# Altium PCB SoldeerboutPCB1.PcbDoc
Units mil, origin at the board's own origin, x right, y up, seen from the top; angles counter-clockwise.
Board outline 6000 x 4000 mil, 2 copper layers (Top Layer, Bottom Layer); 76 components, 74 nets, 283 pads, 2 vias.
Unrouted connection lines stored in the file: 156.
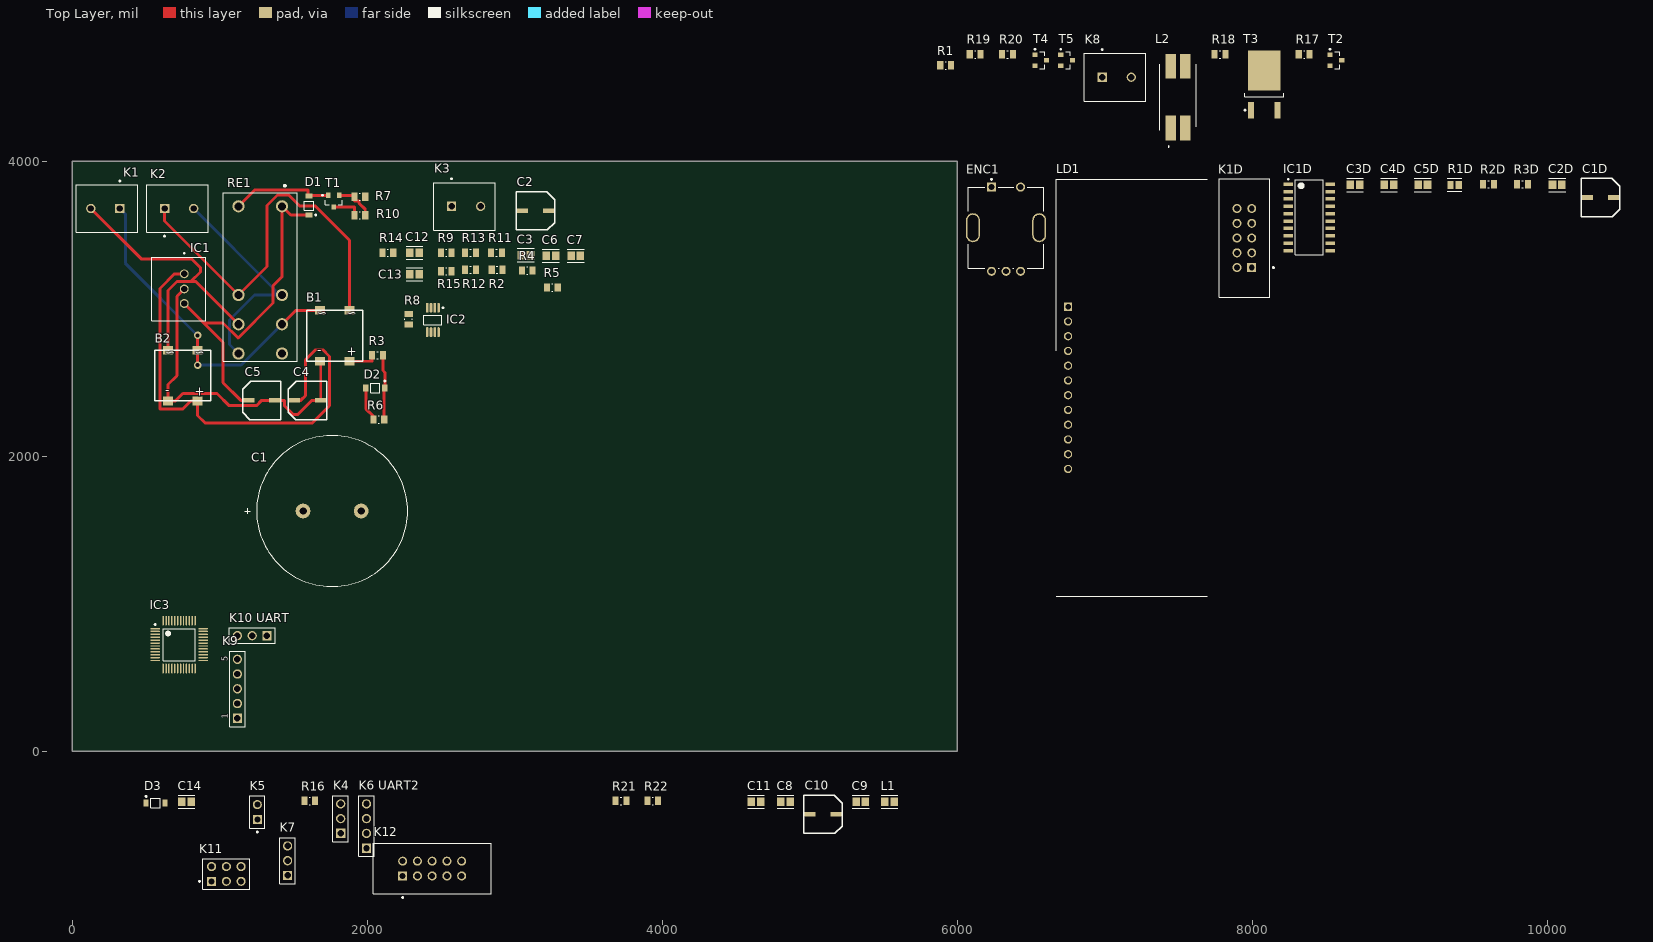
[diagram p0: Top Layer view]
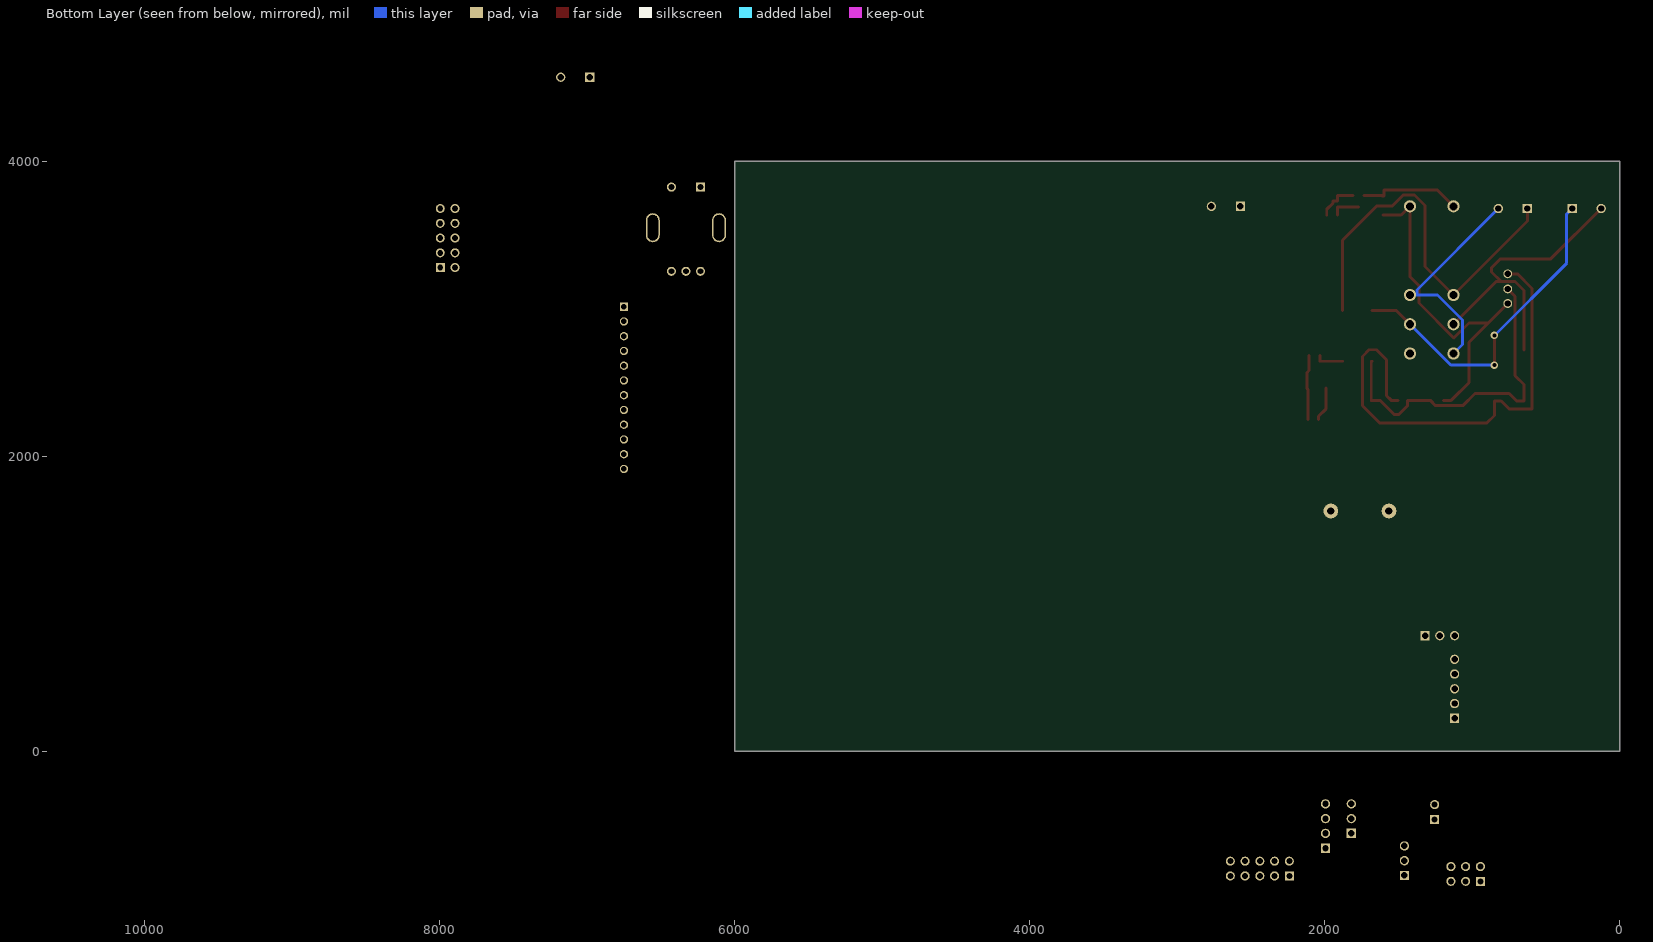
[diagram p1: Bottom Layer view, seen from below]

## Layer stack, top to bottom
Top Solder: solder mask 0.4, Solder Resist, Dk 3.5
Top Layer: signal copper 1.4
Dielectric 1: dielectric 12.6, FR-4, Dk 4.8
Bottom Layer: signal copper 1.4
Bottom Solder: solder mask 0.4, Solder Resist, Dk 3.5

## Board outline
0,0 6000,0 6000,4000 0,4000

## Design rules (kind name [scope] priority, off if disabled: settings)
Clearance [All] p1: gap=10 ignorepadtopadclearanceinfootprint=FALSE except(0: Arc-Hole Track-Hole SMDPad-Hole THPad-Hole Via-Hole Fill-Hole Poly-Hole Region-Hole Text-Hole; 5: SMDPad-SMDPad)
PolygonConnect [All] p1: connectstyle=Relief reliefconductorwidth=10 reliefentries=4 polygonreliefangle="90 Angle" airgapwidth=10
RoomDefinition thermokoppel [InComponentClass('thermokoppel')] p1: confinementstyle=ConfineIn formatcopy=TRUE lockcomponents=FALSE outline 1800,4320 5995,4320 5995,4800 1800,4800
RoomDefinition PWM_Soldeerbout [InComponentClass('PWM_Soldeerbout')] p2: confinementstyle=ConfineIn formatcopy=TRUE lockcomponents=FALSE outline 6045,4050 8635,4050 8635,4875 6045,4875
RoomDefinition Display [InComponentClass('Display')] p3: confinementstyle=ConfineIn formatcopy=TRUE lockcomponents=FALSE outline 6045,1035 10500,1035 10500,3995 6045,3995
RoomDefinition CPU [InComponentClass('CPU')] p4: confinementstyle=ConfineIn formatcopy=TRUE lockcomponents=FALSE outline 470,-1115 5620,-1115 5620,-185 470,-185
RoutingVias [All] p1: holewidth=28 width=50 viastyle="Through Hole" minholewidth=28 minwidth=50 maxholewidth=28 maxwidth=50
SolderMaskExpansion [All] p1: expansion=4 istentingtop=FALSE
Width [All] p1: maxlimit=20 minlimit=20 preferedwidth=20 minimp=50.000000 maximp=50.000000 favimp=50.000000
30 further rules are at their usual default settings.

## Classes and differential pairs
component class voeding: B1 B2 C1 C4 C5 D1 D2 IC1 K1 K2 R3 R6 R7 R10 RE1 T1
component class thermokoppel: C2 C3 C6 C7 C12 C13 IC2 K3 R1 R2 R4 R5 R8 R9 R11 R12 R13 R14 R15
component class PWM_Soldeerbout: K8 L2 R17 R18 R19 R20 T2 T3 T4 T5
component class Display: C1D C2D C3D C4D C5D ENC1 IC1D K1D LD1 R1D R2D R3D
component class CPU: C8 C9 C10 C11 C14 D3 IC3 K4 K5 "K6 UART2" K7 K9 "K10 UART" K11 K12 L1 R16 R21 R22

## Components (designator, comment, footprint, x,y, rotation, side; value= is the part's Value field where it differs from the comment)
B1 "Bridge_Rectifier" ttf 1780,2820 r0 top
B2 "Bridge_Rectifier" ttf 750,2550 r0 top
C1 "4700µf" CE_D25_L25_plugin 1958.7,1630 r180 top
C1D "100µf" CE_D6,3_L4,5 10360,3755 r0 top
C2 "10µf" CE_D6,3_L4,5 3140,3665 r0 top
C2D "100nf" CC_0805_L 10065,3840 r0 top value="0.22 μF"
C3 "100nF" CC_0805_L 3075,3365 r0 top value="0.22 μF"
C3D "10nf" CC_0805_L 8695,3840 r0 top value="0.22 μF"
C4 "100µf" CE_D6,3_L4,5 1595,2380 r180 top
C4D "10nf" CC_0805_L 8925,3840 r0 top value="0.22 μF"
C5 "10µf" CE_D6,3_L4,5 1285,2380 r180 top
C5D "10nf" CC_0805_L 9155,3840 r0 top value="0.22 μF"
C6 "10nF" CC_0805_L 3245,3360 r0 top value="0.22 μF"
C7 "10nF" CC_0805_L 3413.47,3360 r0 top value="0.22 μF"
C8 "100nf" CC_0805_L 4835,-340 r0 top value="0.22 μF"
C9 "100nf" CC_0805_L 5345,-340 r0 top value="0.22 μF"
C10 "10µf" CE_D6,3_L4,5 5090,-425 r0 top
C11 "100nf" CC_0805_L 4635,-340 r0 top value="0.22 μF"
C12 "10nF" CC_0805_L 2320,3380 r0 top value="0.22 μF"
C13 "10nF" CC_0805_L 2320,3235 r0 top value="0.22 μF"
C14 "100nf" CC_0805_L 775,-340 r0 top value="0.22 μF"
D1 "Diode" SOD-123FL 1605,3700 r90 top value=15pF
D2 "Zener_Diode" SOD-123FL 2055,2465 r180 top
D3 "Diode" SOD-123FL 565,-350 r0 top value=15pF
ENC1 "ROTARY_ENCODER_1" PEC11R_4220F_S0012 6330,3550 r0 top
IC1 "OKI-78SR-5/1.5-W36-C" OKI78SR515W36C 760,3237.36 r270 top
IC1D "TM1637" SOP_20_M 8385,3620 r0 top
IC2 "Dual_Opamp" MSOP_8_M 2445,2925 r270 top
IC3 "ATMEGA4809" TQFP_48_M 725,725 r0 top
K1 "282836-2" "2x1 Schroef pin TECO-282836-2_V" 225,3680 r180 top
K1D "1-1634688-0" "5x2 pin - TECO-1-1634688-0-10_V" 7945,3480 r90 top
K2 "282836-2" "2x1 Schroef pin TECO-282836-2_V" 725,3680 r0 top
K3 "282836-2" "2x1 Schroef pin TECO-282836-2_V" 2670,3695 r0 top
K4 "61300311121" "3x1 pin" 1820,-455 r90 top
K5 "M20-9990246" "2x1 pin" 1255,-410 r90 top
"K6 UART2" "61300411121" "4x1 pin" 1995,-505 r90 top
K7 "61300311121" "3x1 pin" 1460,-740 r90 top
K8 "282836-2" "2x1 Schroef pin TECO-282836-2_V" 7080,4570 r0 top
K9 "61300511121" "5x1 pin" 1120,425 r90 top
"K10 UART" "61300311121" "3x1 pin" 1220,785 r180 top
K11 "3x2 Pin_1" "3x2 pin FP-M20-9980346-MFG" 1045,-830 r0 top
K12 "1-1634688-0" "5x2 pin - TECO-1-1634688-0-10_V" 2440,-793.31 r0 top
L1 "Choke" CC_0805_L 5540,-340 r0 top
L2 "Common_Mode_Choke" 2545 7495,4435 r0 top
LD1 "7SEG - KW4-801AVB" kw4 6750,2715 r0 top
R1 "18Kohm" R_0805_M 5920,4650 r0 top
R1D "10K" CC_0805_m 9370,3840 r0 top
R2 "1Mohm" R_0805_M 2880,3265 r0 top
R2D "10K" R_0805_M 9600,3845 r0 top
R3 "68Kohm" R_0805_M 2070,2685 r180 top
R3D "10K" R_0805_M 9830,3845 r0 top
R4 "5.6Kohm" R_0805_M 3085,3260 r0 top
R5 "5.6Kohm" R_0805_M 3255,3145 r0 top
R6 "10Kohm" R_0805_M 2078.58,2250 r0 top
R7 "10Kohm" R_0805_M 1950,3760 r180 top
R8 "100ohm" R_0805_M 2280,2930 r270 top
R9 "10Mohm" R_0805_M 2535,3380 r0 top
R10 "47Kohm" R_0805_M 1950,3635 r0 top
R11 "18Kohm" R_0805_M 2876.42,3380 r0 top
R12 "18Kohm" R_0805_M 2700,3265 r0 top
R13 "5.6Kohm" R_0805_M 2700,3380 r180 top
R14 "5.6Kohm" R_0805_M 2140,3380 r180 top
R15 "100ohm" R_0805_M 2535,3255 r180 top
R16 "47Kohm" R_0805_M 1610,-335 r0 top
R17 "47Kohm" R_0805_M 8350,4725 r0 top
R18 "100ohm" R_0805_M 7780,4725 r0 top
R19 "10Kohm" R_0805_M 6120,4725 r0 top
R20 "47Kohm" R_0805_M 6340,4725 r0 top
R21 "47Kohm" R_0805_M 3720,-335 r0 top
R22 "47Kohm" R_0805_M 3935,-335 r0 top
RE1 "RELAY_GENERAL_PURPOSE" RT42 1275,3695 r270 top
T1 "Transistor_NPN" SOT_23#1 1772.4,3730.63 r270 top
T2 "Transistor_NPN" SOT_23#2 8565,4685 r0 top
T3 "MOSFET_P (IRF9Z34NPBF)" TO_252 8080,4520 r90 top
T4 "Transistor_NPN" SOT_23#2 6565,4685 r0 top
T5 "Transistor_PNP" SOT_23#2 6740,4685 r0 top

## Footprints (in the part's own frame and the unit in brackets; to place one, negate y for a bottom-side part, rotate by r counter-clockwise, add the part's x,y. Pads: shape width x height; smd on the part's side, far side on the other; paste and mask are expansions set on the pad)
"2x1 pin" [mm]
  rect 1.57x1.57 hole 1.02 paste-1000 mask+0: 1(-1.27,0)
  round 1.57 hole 1.02 paste-1000 mask+0: 2(1.27,0)
  silkscreen extent -3.55,-1.32 2.79,1.32, body extent -2.89,-1.42 2.89,1.42, height 0.25
"2x1 Schroef pin TECO-282836-2_V" [mm] "Female Header, Pitch 5mm, 1 x 2 Position, Height 10mm"
  rect 1.6x1.6 hole 1.1: 1(-2.5,0)
  round 1.6 hole 1.1: 2(2.5,0)
  silkscreen extent -5.6,-4.87 5,4.1, body extent -5.6,-4.1 5,4.1, height 13.5
"3x1 pin" [mm] "Pin Header, pitch 2.54 mm, THT, Vertical, single row, 3p"
  rect 1.6x1.6 hole 1.1: 1(-2.54,0)
  round 1.6 hole 1.1: 2(0,0) 3(2.54,0)
  silkscreen extent -3.96,-1.34 3.96,1.34, body extent -3.81,-1.27 3.81,1.27, height 8.57
"3x2 pin FP-M20-9980346-MFG" [mm]
  rect 1.57x1.57 hole 1.02 paste-1000 mask+0: 1(-2.54,-1.27)
  round 1.57 hole 1.02 paste-1000 mask+0: 2(-2.54,1.27) 3(0,-1.27) 4(0,1.27) 5(2.54,-1.27) 6(2.54,1.27)
  silkscreen extent -4.76,-2.64 4.06,2.64, body extent -4.16,-2.74 4.16,2.74, height 0.25
"4x1 pin" [mm] "Pin Header, pitch 2.54 mm, THT, Vertical, single row, 4p"
  rect 1.6x1.6 hole 1.1: 1(-3.81,0)
  round 1.6 hole 1.1: 2(-1.27,0) 3(1.27,0) 4(3.81,0)
  silkscreen extent -5.23,-1.34 5.23,1.34, body extent -5.08,-1.27 5.08,1.27, height 8.57
"5x1 pin" [mm] "Pin Header, pitch 2.54 mm, THT, Vertical, single row, 5p"
  rect 1.6x1.6 hole 1.1: 1(-5.08,0)
  round 1.6 hole 1.1: 2(-2.54,0) 3(0,0) 4(2.54,0) 5(5.08,0)
  silkscreen extent -6.5,-1.34 6.5,1.34, body extent -6.35,-1.27 6.35,1.27, height 8.57
"5x2 pin - TECO-1-1634688-0-10_V" [mm] "10-Pin Connector, Body 20.35x8.7mm, Pitch 2.54mm"
  rect 1.55x1.55 hole 1.02: 1(-5.08,-1.27)
  round 1.55 hole 1.02: 2(-5.08,1.27) 3(-2.54,-1.27) 4(-2.54,1.27) 5(0,-1.27) 6(0,1.27) 7(2.54,-1.27) 8(2.54,1.27) 9(5.08,-1.27) 10(5.08,1.27)
  silkscreen extent -10.18,-5.13 10.18,4.35, body extent -10.17,-4.35 10.18,4.65, height 9
2545 [mm]
  rect 1.78x4.27 smd: 1(-1.27,-5.305) 2(1.27,-5.305) 3(1.27,5.305) 4(-1.27,5.305)
  silkscreen extent -3.15,-8.6 3.15,5.69, body extent -3.15,-7.26 3.15,7.26, height 9.6
CC_0805_L [mil]
  rect 51.36x57.33 smd paste+0 mask+0: 1(-31.53,0) 2(31.53,0)
  silkscreen extent -57,-44 57,44, body extent -67,-39 67,39, height 10
CC_0805_m [mil]
  rect 43.49x53.39 smd paste+0 mask+0: 1(-27.59,0) 2(27.59,0)
  silkscreen extent -49,-44 49,44, body extent -53,-32 53,32, height 10
CE_D6,3_L4,5 [mm]
  rect 2x0.8 smd: 1(-2.286,0) 2(2.286,0)
  silkscreen extent -3.3,-3.3 3.3,3.3
CE_D25_L25_plugin [mm]
  round 2.54 hole 1.27: 1(0,0) 2(10,0)
  silkscreen extent -8,-13 20.07,13
kw4 [mm]
  rect 1.425x1.425 hole 0.95: 1(0,7.62)
  round 1.425 hole 0.95: 2(0,5.08) 3(0,2.54) 4(0,0) 5(0,-2.54) 6(0,-5.08) 7(0,-7.62) 8(0,-10.16) 9(0,-12.7) 10(0,-15.24) 11(0,-17.78) 12(0,-20.32)
  silkscreen extent -2.02,-42.23 23.93,29.53
MSOP_8_M [mm] "TSOP, 8-Leads, Body 3x3mm, Pitch 0.65mm, IPC Medium Density"
  oval 1.7x0.45 smd: 1(-2.1,0.975) 2(-2.1,0.325) 3(-2.1,-0.325) 4(-2.1,-0.975) 5(2.1,-0.975) 6(2.1,-0.325) 7(2.1,0.325) 8(2.1,0.975)
  silkscreen extent -2.22,-1.55 0.85,1.88, body extent -1.55,-1.55 1.55,1.55, height 1.1
OKI78SR515W36C [mm]
  round 1.519 hole 1.08: 1(0,0) 2(2.6,0) 3(5.1,0)
  silkscreen extent -3.6,-5.6 8.05,3.7, body extent -2.85,-3.7 8.05,5.6, height 16.6
PEC11R_4220F_S0012 [mm]
  rect 1.55x1.55 hole 1 paste-1000 mask+0: 1(-2.5,7)
  round 1.55 hole 1 paste-1000 mask+0: 2(2.5,7) A(-2.5,-7.5) B(2.5,-7.5) C(0,-7.5)
  rrect100% 2.4x5 hole 4.4 slot 1.8 at 0 deg paste-1000 mask+0: 3(-5.7,0) 4(5.7,0)
  silkscreen extent -6.5,-6.95 6.5,8.45, body extent -7,-8.37 7,7.88, height 0.25
R_0805_M [mm] "Chip Resistor, 2-Leads, Body 2.00x1.25mm, IPC Medium Density"
  rect 1.05x1.45 smd: 1(-0.925,0) 2(0.925,0)
  silkscreen extent -0.1,-0.62 0.1,0.62, body extent -1.1,-0.72 1.1,0.72, height 0.5
RT42 [mm]
  round 2.1 hole 1.4: 11(20.3,3.75) 12(15.26,3.75) 14(25.34,3.75) 21(20.3,-3.75) 22(15.26,-3.75) 24(25.34,-3.75) A1(0,3.75) A2(0,-3.75)
  silkscreen extent -3.67,-6.35 26.65,6.35, body extent -2.21,-6.35 26.79,6.35, height 3.26
SOD-123FL [mm] "SOD, 2-Leads, Body 2.7x1.65mm"
  rect 0.91x1.22 smd: 1(-1.635,0) 2(1.635,0)
  silkscreen extent -1.76,-1.29 0.78,0.82, body extent -1.35,-0.82 1.35,0.82, height 1
SOP_20_M [mm] "SOIC,20-Leads,Body 12.9x5.6mm,Pitch 1.27mm,IPC Medium Density"
  rrect17% 1.65x0.6 smd: 1(-3.625,5.715) 2(-3.625,4.445) 3(-3.625,3.175) 4(-3.625,1.905) 5(-3.625,0.635) 6(-3.625,-0.635) 7(-3.625,-1.905) 8(-3.625,-3.175) 9(-3.625,-4.445) 10(-3.625,-5.715) 11(3.625,-5.715) 12(3.625,-4.445) 13(3.625,-3.175) 14(3.625,-1.905) 15(3.625,-0.635) 16(3.625,0.635) 17(3.625,1.905) 18(3.625,3.175) 19(3.625,4.445) 20(3.625,5.715)
  silkscreen extent -3.75,-6.45 2.4,6.69, body extent -2.8,-6.45 2.8,6.45, height 2
SOT_23#1 [mm] "SOT23, 3-Leads, Body 2.92x1.3mm, Pitch 0.95mm"
  rect 0.9x0.8 smd: 1(-1,-0.95) 2(-1,0.95) 3(1,0)
  silkscreen extent -1.12,-2.02 0.65,1.46, body extent -0.65,-1.46 0.65,1.46, height 1.11
SOT_23#2 [mm] "SOT23, 3-Leads, Body 2.92x1.3mm, Pitch 0.95mm"
  rect 0.9x0.8 smd: 1(-1,0.95) 2(-1,-0.95) 3(1,0)
  silkscreen extent -1.12,-1.46 0.65,2.02, body extent -0.65,-1.46 0.65,1.46, height 1.11
TO_252 [mm] "DPAK, 3-Leads, Body 6.5x6.12mm, Pitch 2.28mm, IPC Low Density"
  rect 2.85x1 smd: 1(-4.4,2.28) 3(-4.4,-2.28)
  rect 6.9x5.65 smd: 2(2.4,0)
  silkscreen extent -4.52,-3.35 -1.45,3.45, body extent -2.05,-3.32 4.17,3.32, height 2.35
TQFP_48_M [mm]
  rect 1.655x0.252 smd paste+0 mask+0: 1(-4.125,2.75)
  rrect100% 1.655x0.252 smd paste+0 mask+0: 2(-4.125,2.25) 3(-4.125,1.75) 4(-4.125,1.25) 5(-4.125,0.75) 6(-4.125,0.25) 7(-4.125,-0.25) 8(-4.125,-0.75) 9(-4.125,-1.25) 10(-4.125,-1.75) 11(-4.125,-2.25) 12(-4.125,-2.75) 25(4.125,-2.75) 26(4.125,-2.25) 27(4.125,-1.75) 28(4.125,-1.25) 29(4.125,-0.75) 30(4.125,-0.25) 31(4.125,0.25) 32(4.125,0.75) 33(4.125,1.25) 34(4.125,1.75) 35(4.125,2.25) 36(4.125,2.75)
  rrect100% 0.252x1.655 smd paste+0 mask+0: 13(-2.75,-4.125) 14(-2.25,-4.125) 15(-1.75,-4.125) 16(-1.25,-4.125) 17(-0.75,-4.125) 18(-0.25,-4.125) 19(0.25,-4.125) 20(0.75,-4.125) 21(1.25,-4.125) 22(1.75,-4.125) 23(2.25,-4.125) 24(2.75,-4.125) 37(2.75,4.125) 38(2.25,4.125) 39(1.75,4.125) 40(1.25,4.125) 41(0.75,4.125) 42(0.25,4.125) 43(-0.25,4.125) 44(-0.75,4.125) 45(-1.25,4.125) 46(-1.75,4.125) 47(-2.25,4.125) 48(-2.75,4.125)
  silkscreen extent -4.25,-2.75 2.75,3.58, body extent -5.2,-5.2 5.2,5.2, height 0.25
ttf [mm]
  rect 1.7x1.5 smd: 1(2.54,-4.445) 2(-2.54,-4.445) 3(-2.54,4.318) 4(2.54,4.318)
  silkscreen extent -4.83,-4.4 4.83,4.3

## Part data
B1 B2: Average Rectified Current-Max=0.8A, Forward Voltage=1V, Manufacturer="Diodes Inc", Package Description="4-Pin Small Outline Integrated Circuit, Body 4.7 x 3.8 mm, Pitch 2.5 mm", Package Reference=MiniDIP-4, Package Version=05/2016, Peak Current-Max=30A, Reverse Current-Max=5µA, Reverse Voltage-Max [Vrrm]=600V, Datasheet URL=http://www.diodes.com/_files/datasheets/ds17003.pdf, Datasheet Version="Rev. 13-2, 12/2010", Manufacturer URL=http://www.diodes.com/, Mounting Technology=SurfaceMount, Package URL=http://www.diodes.com/_files/packages/MiniDIP.pdf
C1 C1D C2 C4 C5 C10: library part Capacitor_Electrolytic, Manufacturer=Panasonic, Max Operating Temperature="105 degC", Min Operating Temperature="-55 degC", Package Quantity=500, Voltage Rating="25 V", ComponentLink1Description="Manufacturer URL", ComponentLink1URL=http://www.panasonic.com/, ComponentLink2Description=Datasheet, ComponentLink2URL=http://industrial.panasonic.com/cdbs/www-data/pdf/RDE0000/ABA0000C1181.pdf, DatasheetVersion=03/2016, Height="10.2 mm", Lead Pitch="3.1 mm", Length="10.2 mm", Mount="Surface Mount", Mounting Technology="Surface Mount", PackageDescription="2-Pin Electrolytic Aluminum Capacitor, Body 8.3 x 8.3 mm", PackageReference=EEE-FK1E221P, Packaging="Tape and Reel", Pins=2, REACH SVHC="No SVHC", RoHSCompliant=true
C2D C3 C3D C4D C5D C6 C7 C8 C9 C11 C12 C13 C14: library part Capacitor_Ceramic, Capacitance="0.22 μF", Manufacturer=KEMET, Manufacturer Part Number=C0805C224K5RACTU, Package=C0805C-DN, Temperature="-55°C to +125°C", Temperature Characteristic=X7R, Temperature Coefficient=30ppm/°C, Temperature Range High=+125°C, Temperature Range Low=-55°C, Tolerance=0.1, Voltage Rating="50 V", Automotive=No, Category=Cap, ComponentLink2Description=Datasheet, ComponentLink2URL=https://content.kemet.com/datasheets/KEM_C1003_C0G_SMD.pdf, Device Class L1="Passive Components", Device Class L2=Capacitors, Device Class L3="Ceramic Capacitors", Digikey Description="CAP CER 0.22UF 50V X7R 0805", Height=0.88mm, Ipc Land Pattern Name=CAPC200125X78, Lead Free=Yes, Material=Ceramic, Mouser Description="CAP CER 0.22UF 50V X7R 0805", Octopart=https://octopart.com/c0805c224k5ractu-kemet-144670, RoHS=TRUE
D1 D3: Capacitance=15pF, Forward Current=1A, Manufacturer=Diotec, Manufacturer Part Number=1N4007, Max Junction Temp=+175°C, Max Repetitive Reverse Voltage=1000V, Max Surge Forward Current=27A, Peak Reverse Current=5uA, Temperature="-50°C to +175°C", Temperature Range Low=-50°C, Automotive=No, Category=Diode, ComponentLink2Description=Datasheet, ComponentLink2URL=https://datasheet.octopart.com/1N4007-Diotec-datasheet-62346875.pdf, Device Class L1="Discrete Semiconductors", Device Class L2=Diodes, Device Class L3="Rectifier Diodes", Height=2.8mm, Ipc Land Pattern Name=DIOAD888W100L520D280, Lead Free=Yes, Octopart=https://octopart.com/1n4007-diotec-4040411, Package=1N4007, Reverse Voltage=1000V, RoHS=TRUE, Temperature Range High=+175°C
D2: Manufacturer="On Semiconductor", PartNumber=1SMB5920BT3G, ComponentLink1Description="Manufacturer URL", ComponentLink1URL=http://www.onsemi.com/, ComponentLink2Description=Datasheet, ComponentLink2URL=http://www.onsemi.com/pub_link/Collateral/1SMB5913BT3-D.PDF, ComponentLink3Description="Package Specification", ComponentLink3URL=http://www.onsemi.com/pub_link/Collateral/1SMB5913BT3-D.PDF, DatasheetVersion="Rev. 8", Mounting Technology="Surface Mount", PackageDescription="2-Pin Small Molded Package, J-Bend Lead, Body 4.33 x 3.625 mm", PackageReference=SMB-2-403A-03_H, PackageVersion="Rev. H, 05/2011", Packing="Tape and Reel", RoHS=Pb-Free, VZ Typ (V)=6.2
ENC1: Current Rating=10mA, Manufacturer=Bourns, Manufacturer Part Number=PEC11R-4015F-N0024, Package=0, Temperature="-30°C to +70°C", Temperature Range High=+70°C, Temperature Range Low=-30°C, Voltage Rating Dc=5V, Automotive=No, Category=Enc, ComponentLink2Description=Datasheet, ComponentLink2URL=https://www.bourns.com/docs/product-datasheets/pec11r.pdf?sfvrsn=bb617cbf_7, Conn Orientation=Vertical, Detent=No, Device Class L1=Electromechanical, Device Class L2=Switches, Device Class L3=Encoders, Digikey Description="ROTARY ENCODER MECHANICAL 24PPR", Encoder Type=Incremental, Height=22.3mm, Lead Free=Yes, Mouser Description="Encoders 15mm SHAFT NO SWITCH", Number Of Circuits=1, Octopart=https://octopart.com/pec11r-4015f-n0024-bourns-26648251, Pulses Per Rev=24, RoHS=TRUE
IC1: "Non-Isolated DC/DC Converter, 7.5 W, 7 to 36 V, 1.5 A, -40 to 85 degC, 3-Pin THD, RoHS", Current - Output (Max)=1.5A, Manufacturer=Murata, Operating Temperature=-40degC~85degC, Package / Case=3-SIPModule, Power (Watts) - Manufacture Series=8W, Voltage - Input (Max)=36V, Voltage - Input (Min)=7V, Voltage - Isolation=-, Voltage - Output 1=5V, Applications=ITE(Commercial), Category=PowerSupplies-BoardMount, Datasheet URL=https://datasheet.ciiva.com/8006/1790439-8006672.pdf, Datasheet Version=Oct-13, Efficiency=90.5%, Family=DCDCConverters, Features=SCP, Manufacturer URL=http://www.murata.com/, Mounting Type=ThroughHole, Number of Outputs=1, Packaging=Tube, Power (Watts) - Max=8W, Series=Okami™OKI-78SR, Size / Dimension="0.41\"Lx0.30\"Wx0.65\"H(10.4mmx7.6mmx16.5mm)", Type=LinearRegulatorReplacement, Voltage - Output 2=-, Voltage - Output 3=-
IC1D: "LED Drive Control Special Circuit", Package=Package, Availability="Not in stock", Check_prices=https://www.snapeda.com/parts/TM1637/Titan+Micro+Electronics/view-part/?ref=eda, MF="Titan Micro Electronics", MP=TM1637, Price=None, SnapEDA_Link=https://www.snapeda.com/parts/TM1637/Titan+Micro+Electronics/view-part/?ref=snap
IC2: Case/Package=PDIP, Input Bias Current=1pA, Input Offset Voltage (Vos)=4.5mV, Max Operating Temperature=125°C, Max Supply Voltage=6V, Min Operating Temperature=-40°C, Min Supply Voltage=1.8V, Nominal Supply Current=100uA, Operating Supply Voltage=5.5V, Output Current=23mA, Package Quantity=60, Power Supply Rejection Ratio (PSRR)=86dB, Voltage Gain=112dB, Amplifier Type="GENERAL PURPOSE", Bandwidth=1MHz, Common Mode Rejection Ratio=60dB, Gain Bandwidth Product=1MHz, Height=3.3mm, Input Offset Voltage-Max=4.5mV, Lead Free="Lead Free", Length=9.27mm, Mount="Through Hole", Number of Amplifiers=2, Number of Channels=2, Number Of Circuits=2, Number of Elements=2, Number of Pins=8, Operating Supply Current=100uA, Output Current per Channel=23mA, Packaging=Rail/Tube, Radiation Hardening=No, REACH SVHC="No SVHC", RoHS Compliant=Yes, Slew Rate=0.6V/µs, Slew Rate-Nom=0.6V/µs, Supply Current=100uA, Technology=CMOS, Unity Gain Bandwidth Product=1MHz, Width=6.35mm
IC3: Case/Package=TQFP, Max Operating Temperature=85°C, Min Operating Temperature=-40°C, Core Architecture=AVR, Interface=I2C, Memory Size=48KB, Memory Type=FLASH, Mount="Surface Mount", Number of I/Os=41, Oscillator Type=Internal, Peripherals="Brown-out Detect/Reset", RoHS Compliant=Yes, Series="megaAVR® 0, Functional Safety (FuSa)"
K1 K2 K3 K8: library part "2x1 schroef pin", "Female Header, Pitch 5 mm, 1 x 2 Position, Height 10 mm, Tail Length 3.5 mm, Rohs, Bulk", Color=Green, Current=13.5A, Manufacturer="TE Connectivity", Package Description="Female Header, Pitch 5 mm, 1 x 2 Position, Height 10 mm, Tail Length 3.5 mm", Package Reference=THD, Standard Package=300, Voltage=300V, 3D Model=282836-2.pdf, Category=Connectors,Interconnects, Clamp Material - Plating=Brass-NickelPlated, Contact Material - Plating=Brass-TinPlated, Datasheet URL=http://www.te.com.cn/commerce/DocumentDelivery/DDEController?Action=showdoc&DocId=Catalog+Section%7F1308389_EUROSTYLE_TERMINAL_BLOCKS%7F0607%7Fpdf%7FEnglish%7FENG_CS_1308389_EUROSTYLE_TERMINAL_BLOCKS_0607.pdf%7F282836-2, Dynamic Catalog=BuchananSeries, Family=TerminalBlocks-WiretoBoard, Featured Product=EurostyleTerminalBlockConnectors, Features=Interlocking(Side), Housing Material=Polyamide(PA66),Nylon6/6, Manufacturer URL=http://www.te.com, Mating Orientation=HorizontalwithBoard, Mounting Type=ThroughHole, Number of Levels=1, Other Names="5ULV-02B / A98076", Packaging=Bulk, Pitch="0.197\"(5.00mm)", Positions Per Level=2, Product Training Modules=Wire-to-BoardEurostyleTerminalBlocks, RoHS Information=282836-2StatementofCompliance, Screw Material - Plating=Brass-NickelPlated, Screw Thread=M3, Series=Buchanan, Torque - Screw=0.68Nm(6Lb-In), Wire Gauge=16-30AWG, Wire Termination=Screw-RisingCageClamp
K1D K12: library part "5x2 Pin", "Male Header, Pitch 2.54 mm, 2 x 5 Postion, Height 9.15 mm, Tail Length 3.2 mm, -40 to 105 degC, RoHS, Bulk", Manufacturer="TE Connectivity", Package Description="10-Pin Connector, Body 20.35 x 8.7 mm, Pitch 2.54 mm", Package Version="Rev. C2, 02/2011", Contact Material=Brass, Contact Plating=GoldPlatedContacts, Contact Termination Type=ThroughHole, Datasheet URL=https://datasheet.ciiva.com/6831/eng-cd-1634688-c2-6831201.pdf, Datasheet Version="Rev. C2, 02/2011", Gender=Header, Manufacturer URL=http://www.te.com/, Mounting Technology=ThroughHole, No. of Contacts=10Contacts, No. of Positions=10, No. of Rows=2, Orientation=Straight, Package Reference=1-1634688-0, Package URL=https://datasheet.ciiva.com/6831/eng-cd-1634688-c2-6831201.pdf, PartNumber=1-1634688-0, Pitch=2.54mm, Pitch Spacing=2.54mm, Product Range=-, SVHC=ToBeAdvised
K4 K7 "K10 UART": library part "3x1 pin", "THT Vertical Pin Header WR-PHD, Pitch 2.54 mm, Single Row, 3 pins", Contact Resistance=20mOhm, Manufacturer="Wurth Elektronik", Operating Temperature=-40to105degC, Rated Current=3A, Withstanding Voltage=500VAC, Working Voltage=250VAC, Datasheet URL=https://katalog.we-online.de/em/datasheet/6130xx11121.pdf, Gender=Male, Manufacturer URL=http://www.we-online.de, Mounting Technology=THT, Orientation=Vertical, Package Reference=61300311121, Packaging=Bag, Part Number=61300311121, Pin Number=3, Pitch=2.54mm, Publisher=WurthElektronik, Row Number=Single
K5: library part "2x1 pin", "CONN HEADER VERT 2POS 2.54MM", Current Rating=3A, Manufacturer=Harwin, Temperature="-40°C to +105°C", Temperature Range High=+105°C, Temperature Range Low=-40°C, Automotive=No, Category=Conn, ComponentLink2Description=Datasheet, ComponentLink2URL=https://cdn.harwin.com/pdfs/M20-999.pdf, Conn Gender=Male, Conn Orientation=Vertical, Contact Material=Tin,Nickel, Device Class L1=Connectors, Device Class L2="Headers and Wire Housings", Device Class L3=unset, Digikey Description="CONN HEADER VERT 2POS 2.54MM", Height=8.99mm, Lead Free=Yes, Manufacturer Part Number=M20-9990246, Mouser Description="2.54mm (0.1\") Pitch SIL Vertical PC Tail Pin Header, 6.1mm mating pin height, tin, 2 contacts", Number Of Contacts=2, Number Of Rows=1, Octopart=https://octopart.com/m20-9990246-harwin-2590635, Package=M20-9990246, Pitch=2.54mm, RoHS=TRUE
"K6 UART2": library part "4x1 pin", "THT Vertical Pin Header WR-PHD, Pitch 2.54 mm, Single Row, 4 pins", Contact Resistance=20mOhm, Manufacturer="Wurth Elektronik", Operating Temperature=-40to105degC, Rated Current=3A, Withstanding Voltage=500VAC, Working Voltage=250VAC, Datasheet URL=https://katalog.we-online.de/em/datasheet/6130xx11121.pdf, Gender=Male, Manufacturer URL=http://www.we-online.de, Mounting Technology=THT, Orientation=Vertical, Package Reference=61300411121, Packaging=Bag, Part Number=61300411121, Pin Number=4, Pitch=2.54mm, Publisher=WurthElektronik, Row Number=Single
K9: library part "5x1 pin", "THT Vertical Pin Header WR-PHD, Pitch 2.54 mm, Single Row, 5 pins", Contact Resistance=20mOhm, Manufacturer="Wurth Elektronik", Operating Temperature=-40to105degC, Rated Current=3A, Withstanding Voltage=500VAC, Working Voltage=250VAC, Datasheet URL=https://katalog.we-online.de/em/datasheet/6130xx11121.pdf, Gender=Male, Manufacturer URL=http://www.we-online.de, Mounting Technology=THT, Orientation=Vertical, Package Reference=61300511121, Packaging=Bag, Part Number=61300511121, Pin Number=5, Pitch=2.54mm, Publisher=WurthElektronik, Row Number=Single
L1: Case/Package=1350, Current Rating=8.5A, DC Resistance (DCR)=14.1mR, Inductance=10uH, Inductance Tolerance=20%, Max Operating Temperature=155°C, Min Operating Temperature=-40°C, Package Quantity=1, Ratings=AEC-Q200, Resistor Type=Wirewound, Saturation Current=10A, Self Resonant Frequency=18MHz, Series Resistance=14.1R, Test Frequency=100kHz, Height=4.7mm, Height - Seated (Max)=0.197inch, Length=0.512inch, Max DC Current=8.5A, Mount="Surface Mount", Packaging="Tape and Reel", RMS Current (Irms)=8.5A, RoHS Compliant=Yes, Series=WE-HCI, Shielding=Shielded, Termination=SMD/SMT, Tolerance=20%, Width=12.8mm
L2: Case/Package=1808, Current=2A, Current Rating=2.3A, DC Resistance (DCR)=60mR, Insulation Resistance=10MR, Max Operating Temperature=85°C, Max Voltage Rating (DC)=50V, Min Operating Temperature=-40°C, Package Quantity=1, Test Frequency=100MHz, DC Current=2A, DC Resistance-Max=60mR, Depth=4.7mm, Element Configuration=Dual, Height=2mm, Impedance=900R, Lead Free="Lead Free", Length=0.185inch, Max Current Rating=2A, Max DC Current=2A, Mount="Surface Mount", Number of Lines=2, Number of Pins=4, Packaging="Tape and Reel", Radiation Hardening=No, REACH SVHC="No SVHC", RoHS Compliant=Yes, Series=ACM, Termination=Flat, Voltage Rating=50V, Voltage Rating (DC)=50V, Width=4.5mm
LD1: "4-Digit LED Display"
R1 R1D R2 R2D R3 R3D R4 R5 R6 R7 R8 R9 R10 R11 R12 R13 R14 R15 R16 R17 R18 R19 R20 R21 R22: library part Resistor, Manufacturer="Vishay Dale", Part Number=CRCW08050000Z0EA
RE1: Ambient Temperature Range High=+85°C, Ambient Temperature Range Low=-40°C, Coil Power=403mW, Coil Resistance=62Ω, Coil Voltage=5V, Current Rating=8A, Manufacturer="TE Connectivity", Manufacturer Part Number=RT424005, Automotive=No, Category=Relay, Coil Type=Non-Latching, ComponentLink2Description=Datasheet, ComponentLink2URL=https://www.te.com/commerce/DocumentDelivery/DDEController?Action=showdoc&DocId=Data+Sheet%7FRT2%7F1014%7Fpdf%7FEnglish%7FENG_DS_RT2_1014.pdf%7F5-1393243-9, Device Class L1=Electromechanical, Device Class L2=Relays, Device Class L3="Power Relays", Digikey Description="RELAY GENERAL PURPOSE DPDT 8A 5V", Height=15.7mm, Lead Free=Yes, Mouser Description="General Purpose Relay, Rt2 Series, Power, Non Latching, Dpdt, 5 Vdc, 8 A Rohs Compliant: Yes", Number Of Contacts=2, Octopart=https://octopart.com/5-1393243-9-te+connectivity-41835766, Package=RT424005, RoHS=TRUE, Throw Configuration=DPDT
T1 T2 T4: Manufacturer="On Semiconductor", PartNumber=BC547C, ComponentLink1Description="Manufacturer URL", ComponentLink1URL=http://www.onsemi.com/, ComponentLink2Description=Datasheet, ComponentLink2URL=http://www.onsemi.com/pub_link/Collateral/BC546-D.PDF, ComponentLink3Description="Package Specification", ComponentLink3URL=http://www.onsemi.cn/pub_link/Collateral/2N6426-D.PDF, DatasheetVersion="Rev. 7", fT Min (MHz)=150, IC Continuous (A)=0.1, Mounting Technology="Through Hole", PackageDescription="3-Pin Transistor Outline, Body 4.825 x 3.685 mm, Pitch 1.27 mm", PackageReference=TO-92-3-29-11_AM_SL, PackageVersion="Rev. AM", Packing="Bulk Box", Polarity=NPN, RoHS=FALSE
T3: Continuous Drain Current Id=2.4A, Current Temperature=25°C, Drain Source Voltage Vds=20V, Manufacturer="Fairchild Semiconductor", On Resistance Rds(on)=52mohm, Operating Temperature Max=150°C, Operating Temperature Min=-55°C, Operating Temperature Range=-55°Cto+150°C, Package / Case=SOT-23, Package Description="3-Pin Small Outline Transistor, Body 2.92 x 1.4 mm, Pitch 0.95 mm", Package Reference=SSOT3L, Package Version="Rev. 3, 05/2015", Power Dissipation Pd=500mW, Pulse Current Idm=10A, Rds(on) Test Voltage Vgs=-4.5V, Threshold Voltage Vgs Typ=-800mV, Voltage Vds Typ=-20V, Voltage Vgs th Max=-1.5V, Current Id Max=2.4A, Datasheet URL=https://www.fairchildsemi.com/datasheets/FD/FDN304P.pdf, Datasheet Version="Rev. C, 01/2001", External Depth=2.5mm, External Length / Height=1.12mm, External Width=3.05mm, Full Power Rating Temperature=25°C, Manufacturer URL=https://www.fairchildsemi.com/, Mounting Technology=SurfaceMount, No. of Pins=3, Package URL=https://www.fairchildsemi.com/package-drawings/MA/MA03B.pdf, Reel Quantity=3000, SMD Marking=304P, SVHC=NoSVHC(19-Dec-2012), Tape Width=8mm, Termination Type=SMD, Transistor Case Style=SOT-23, Transistor Polarity=PChannel, Voltage Vds=20V, Voltage Vgs Max=-800mV, Voltage Vgs Rds on Measurement=-4.5V
T5: Manufacturer="On Semiconductor", PartNumber=BC557C, ComponentLink1Description="Manufacturer URL", ComponentLink1URL=http://www.onsemi.com/, ComponentLink2Description=Datasheet, ComponentLink2URL=http://www.onsemi.com/pub_link/Collateral/BC556B-D.PDF, ComponentLink3Description="Package Specification", ComponentLink3URL=http://www.onsemi.cn/pub_link/Collateral/2N6426-D.PDF, DatasheetVersion="Rev. 3", IC Continuous (A)=-0.1, Mounting Technology="Through Hole", PackageDescription="3-Pin Transistor Outline, Body 4.825 x 3.685 mm, Pitch 1.27 mm", PackageReference=TO-92-3-29-11_AM_SL, PackageVersion="Rev. AM", Packing="Bulk Box", Polarity=PNP, RoHS=FALSE

## Via types
v1: diameter 50, hole 28, Top Layer to Bottom Layer, 2 vias

## Nets (pads, with @x,y where several pads share a name; then routed paths per layer and width w, separated by ;. In a path a pad name is that pad's centre, name@x,y a point inside that pad or via, vN(x,y) a via of type N, cw(c..) or ccw(c..) an arc to the next point about the centre after c; other vN are vias at no path point)
+5: "K6 UART2.1" C1D.2 C2.2 C2D.1 C3.1 C3D.1 C4D.1 C5.2 C5D.1 C8.1 C9.1 C10.2 D1.1 D3.1 IC1.3 IC1D.16 IC2.8 IC3.14 IC3.42 K1D.1 K7.1 K11.2 K12.1 L1.2 R1D.2 R2.2 R2D.2 R3D.2 R16.1 R21.1 R22.1 RE1.A1 | length 2365.1
  Top Layer w20: IC1.3 891.57,2905 ; C5.2 1143,2380 1023,2500 1023,2773.57 891.57,2905 ; D1.1 1482.01,3635.63 RE1.A1 1422.64,3217.64 1361,3156 1361,3039 1125,2803 1023,2905 891.57,2905
GND: "K6 UART2.4" "K10 UART.3" C1.1 C1D.1 C2.1 C2D.2 C3.2 C6.2 C7.2 C8.2 C9.2 C10.1 C11.2 C12.2 C13.2 D2.2 ENC1.3 ENC1.4 IC1D.1 IC2.4 IC3.15 IC3.29 IC3.43 K1D.10 K3.1 K7.3 K11.6 K12.10 L2.2 R6.1 R8.1 R9.1 R10.1 R15.1 R20.1 T1.3 T4.3 T5.3 | length 433.8
  Top Layer w20: T1.3 1913.58,3691.26 R10.1 ; D2.2 1990.63,2323.54 2042.17,2272 R6.1
NetB1_2: B1.2 B2.2 C4.1 C5.1 IC1.2 | length 2282.6
  Top Layer w20: IC1.2 710,3085 710,2547 650,2487 B2.2 699,2375 750,2426 982,2426 1064,2344 1249,2344 1285,2380 C5.1 1440,2380 1440,2343 1500,2283 1528,2283 1625,2380 C4.1 1685,2645 B1.2
NetB1_3: B1.3 B2.4 K1.1 RE1.11 | length 2262.8
  Top Layer w20: v1(850,2619) B2.4 v1(850,2820) ; RE1.11 1516.85,2990 B1.3
  Bottom Layer w20: K1.1 360,3643.43 360,3310 v1(850,2820) ; v1(850,2619) 1145.85,2619 RE1.11
NetB1_4: B1.4 K2.1 RE1.22 | length 2669.4
  Top Layer w20: K2.1 626.57,3595 RE1.22 1321,3287.85 1321,3700 1392,3771 1468,3771 1542,3697 1648,3697 1880,3465 B1.4
NetB2_1: B2.1 C4.2 IC1.1 | length 3236.9
  Top Layer w20: IC1.1 694.48,3237.36 596,3138.88 596,2321 750,2321 804,2375 B2.1 850,2278 900,2228 1629,2228 1745,2344 1745,2678 1700,2723 1650,2723 1582,2655 1582,2412 1550,2380 C4.2
NetB2_3: B2.3 K1.2 RE1.21 | length 2056.5
  Top Layer w20: K1.2 467.57,3339 809,3339 869,3279 869,3250 804,3185 ; B2.3 650,3125 710,3185 804,3185 ; RE1.21 838.15,3185 804,3185
NetC3D_2: C3D.2 ENC1.1 K1D.5 R1D.1
NetC4D_2: C4D.2 ENC1.2 K1D.7 R2D.1
NetC5D_2: C5D.2 K1D.3 R3D.1
NetC7_1: C7.1 IC2.6 R4.1
NetC11_1: C11.1 IC3.28 L1.1
NetC13_1: C13.1 IC2.2 R13.1
NetC14_1: C14.1 K11.3
NetC14_2: C14.2 D3.2 IC3.40
NetD1_2: D1.2 RE1.A2 T1.1 | length 702.3
  Top Layer w20: RE1.A2 1239.36,3807 1599,3807 1599,3764.37 D1.2 1611,3764.37 1611,3770 T1.1
NetIC1D_2: IC1D.2 LD1.11
NetIC1D_3: IC1D.3 LD1.4
NetIC1D_4: IC1D.4 LD1.2
NetIC1D_5: IC1D.5 LD1.5
NetIC1D_6: IC1D.6 LD1.7
NetIC1D_7: IC1D.7 LD1.8
NetIC1D_8: IC1D.8 LD1.9
NetIC1D_9: IC1D.9 LD1.6
NetIC1D_12: IC1D.12 LD1.12
NetIC1D_13: IC1D.13 LD1.10
NetIC1D_14: IC1D.14 LD1.3
NetIC1D_15: IC1D.15 LD1.1
NetIC1D_17: IC1D.17 K1D.4
NetIC1D_18: IC1D.18 K1D.2
NetIC2_1: IC2.1 R11.1 R14.2
NetIC2_3: IC2.3 R12.2 R15.2
NetIC2_5: IC2.5 R1.2 R8.2
NetIC2_7: IC2.7 R1.1 R5.2
NetIC3_1: IC3.1 K12.5
NetIC3_2: IC3.2 K12.7
NetIC3_3: IC3.3 K12.9
NetIC3_11: IC3.11 K7.2 R16.2
NetIC3_16: IC3.16 K5.1
NetIC3_17: IC3.17 K5.2
NetIC3_23: IC3.23 K9.1
NetIC3_24: IC3.24 K9.2
NetIC3_25: IC3.25 K9.3
NetIC3_26: IC3.26 K9.4
NetIC3_27: IC3.27 K9.5
NetIC3_31: IC3.31 K4.1
NetIC3_32: IC3.32 K4.2
NetIC3_33: IC3.33 K4.3
NetIC3_34: "K6 UART2.2" IC3.34
NetIC3_35: "K6 UART2.3" IC3.35
NetIC3_38: IC3.38 K11.1
NetIC3_39: IC3.39 K11.4
NetIC3_41: IC3.41 K11.5
NetIC3_44: "K10 UART.1" IC3.44
NetIC3_45: "K10 UART.2" IC3.45
NetIC3_46: IC3.46 K12.4 R22.2
NetIC3_47: IC3.47 K12.2 R21.2
NetIC3_48: IC3.48 K12.3
NetK2_2: K2.2 RE1.12 RE1.24 | length 1494
  Bottom Layer w20: K2.2 1375,3128.43 1375,3094.21 ; RE1.24 1066,2758.72 1066,2925 1235.21,3094.21 1375,3094.21 ; RE1.12 1375,3094.21
NetK3_2: K3.2 R2.1 R4.2 R9.2 R13.2
NetK8_1: K8.1 L2.4
NetK8_2: K8.2 L2.3
NetL2_1: L2.1 T3.3
NetR7_2: R7.2 R10.2 T1.2 | length 287.4
  Top Layer w20: T1.2 1913.58,3770 R7.2 1913.58,3732 1945,3732 1945,3716.42 1986.42,3675 R10.2
NetR11_2: R11.2 R12.1
NetR17_1: R17.1 R18.1 T2.2 T2.3 T4.1 T5.1 T5.2
NetR18_2: R18.2 T3.1
NetR19_2: R19.2 R20.2 T4.2
PC0: IC3.10 R19.1
PD0: C6.1 IC3.20 R5.1
PD1: C12.1 IC3.21 R14.1
PD2: D2.1 R3.1 R6.2 | length 442.2
  Top Layer w20: R3.1 2106.42,2582 2119.37,2569.05 D2.1 2119.37,2459 2115,2454.63 R6.2
PE0: IC3.30 R7.1
Vin: B1.1 C1.2 R3.2 R17.2 T2.1 T3.2 | length 193.6
  Top Layer w20: B1.1 2033.58,2645 R3.2
pads on no net: ENC1.A ENC1.B ENC1.C IC1D.10 IC1D.11 IC1D.19 IC1D.20 IC3.4 IC3.5 IC3.6 IC3.7 IC3.8 IC3.9 IC3.12 IC3.13 IC3.18 IC3.19 IC3.22 IC3.36 IC3.37 K1D.6 K1D.8 K1D.9 K12.6 K12.8 RE1.14

## Text inside footprints (layer, text, board x,y; h text height)
B1: Top Overlay "+" at 1860,2735 h60 r180; Top Overlay "-" at 1660,2739.99 h60 r180; Top Overlay "~" at 1860,2994.98 h60 r180; Top Overlay "~" at 1660,2994.98 h60 r180
B2: Top Overlay "+" at 830,2465 h60 r180; Top Overlay "-" at 630,2469.99 h60 r180; Top Overlay "~" at 830,2724.98 h60 r180; Top Overlay "~" at 630,2724.98 h60 r180
K9: Top Overlay "1" at 1053.07,220.28 h40 r90; Top Overlay "5" at 1053.07,610.04 h40 r90